# Altium PCB LM399_Reference.PcbDoc
Units mm, origin at the board's own origin, x right, y up, seen from the top; angles counter-clockwise.
Board outline 100 x 48.06 mm, 2 copper layers (Top Layer, Bottom Layer), stack 1.671 mm thick; 21 components, 8 nets, 67 pads, 1 vias.
Unrouted connection lines stored in the file: 3.
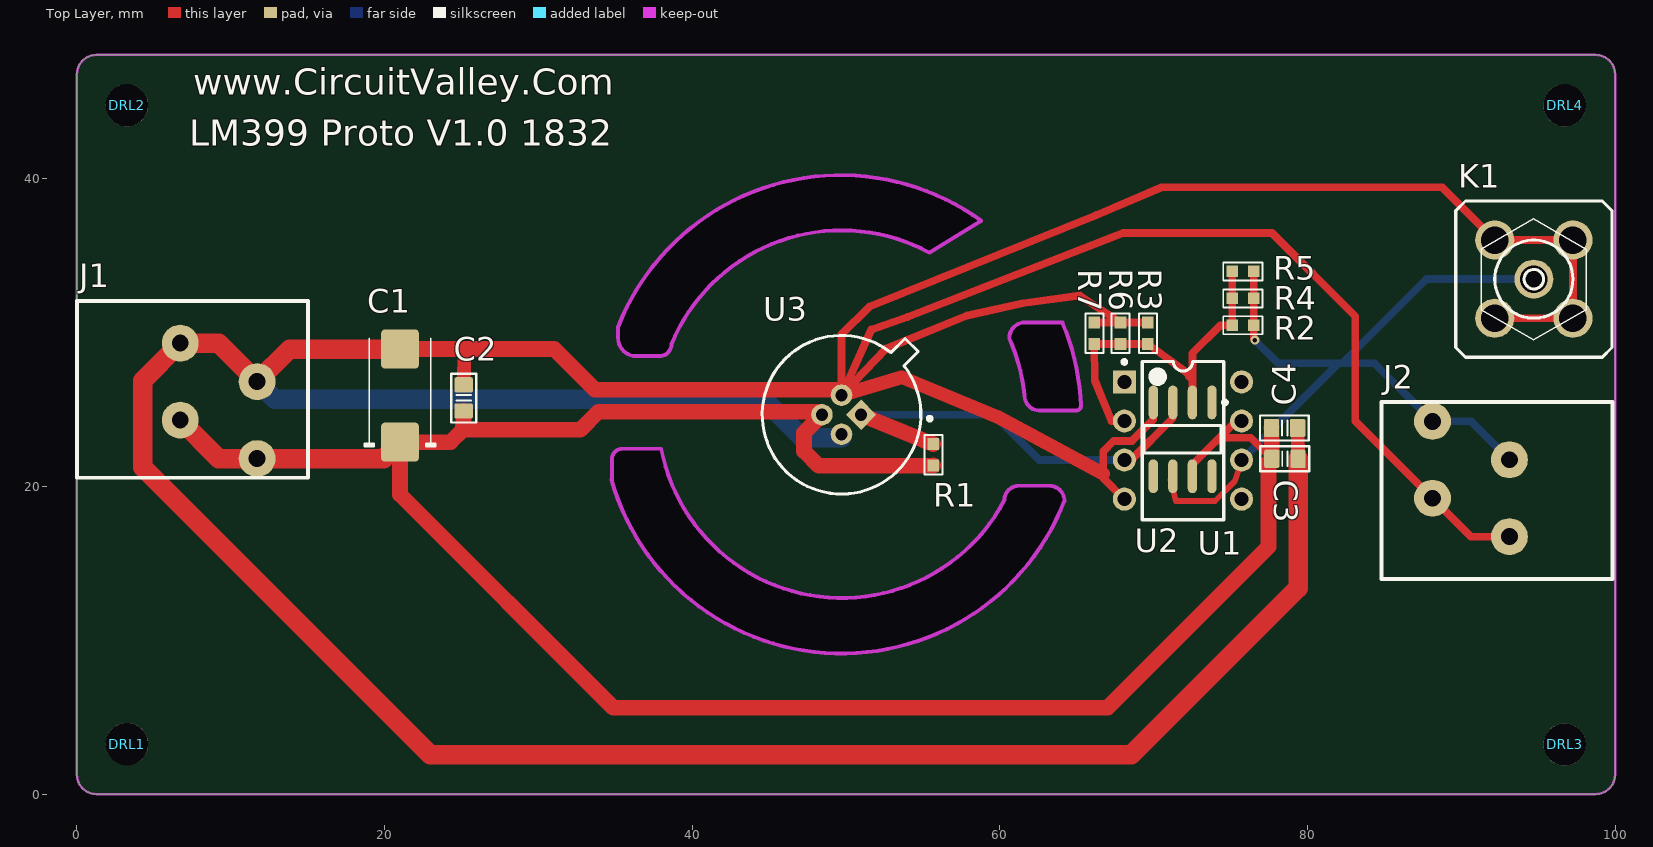
[diagram p0: Top Layer view]
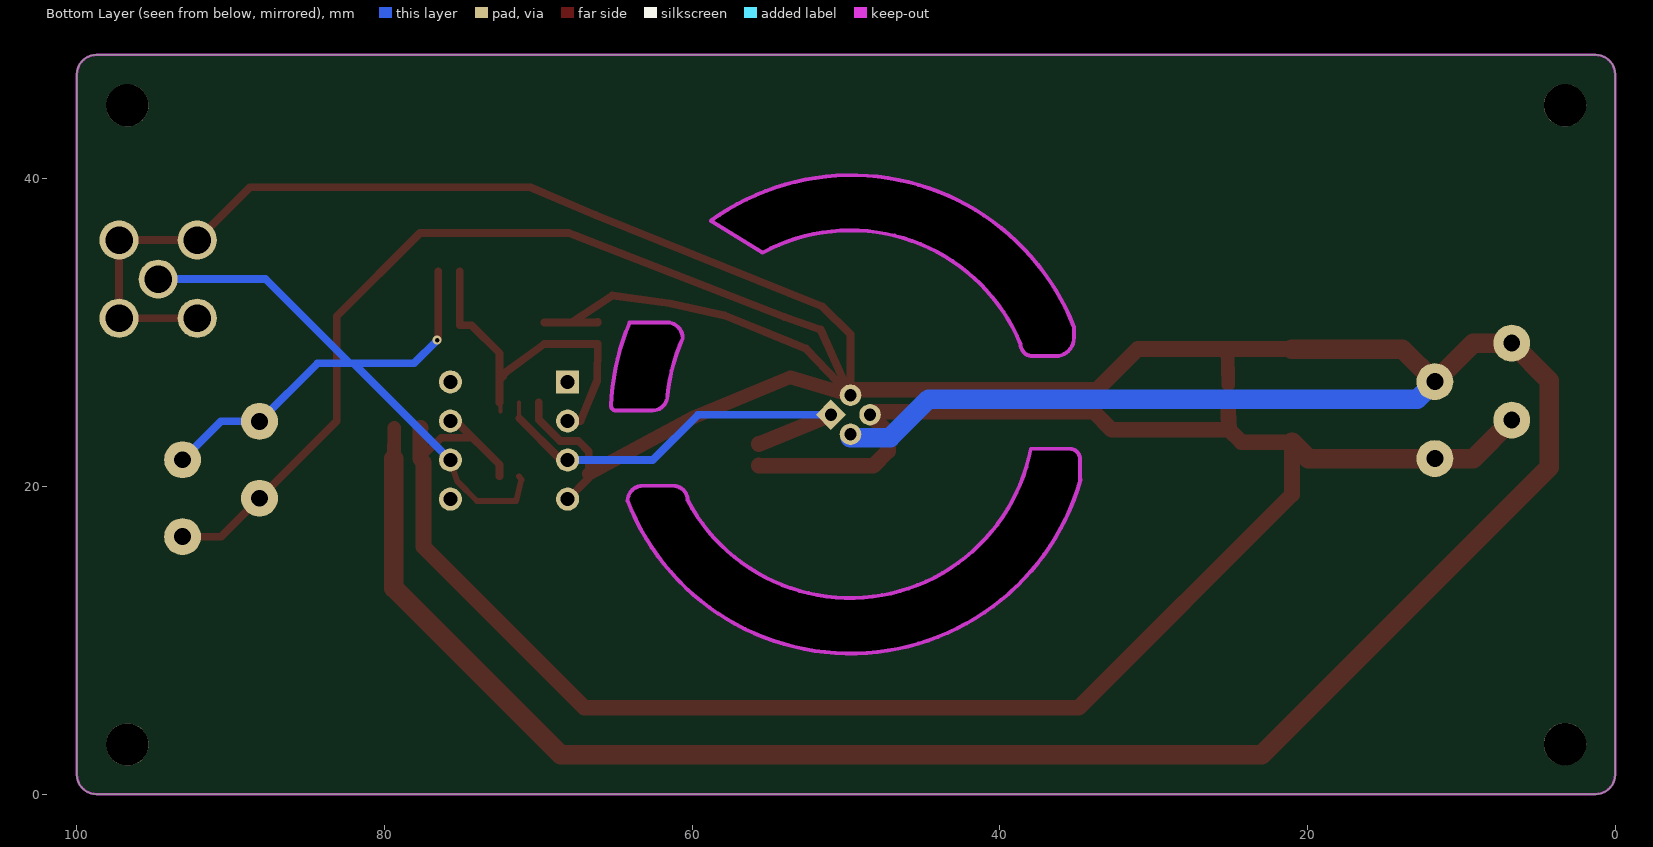
[diagram p1: Bottom Layer view, seen from below]

## Layer stack, top to bottom
Top Solder: solder mask 0.0102, Solder Resist, Dk 3.5
Top Layer: signal copper 0.0356
Dielectric 1: dielectric 1.6, FR-4, Dk 4.8
Bottom Layer: signal copper 0.0356
Bottom Solder: solder mask 0.0102, Solder Resist, Dk 3.5

## Board outline
0,1.27 0,46.787 cw(c1.27,46.787) 1.27,48.057 98.73,48.057 cw(c98.73,46.787) 100,46.787 100,1.27 cw(c98.73,1.27) 98.73,0 1.27,0 cw(c1.27,1.27)
cut-out: 64.066,30.664 64.465,29.616 64.897,28.143 65.075,27.102 65.227,25.933 65.27,25.228 65.227,25.044 64.985,24.943 62.357,24.943 61.951,25.121 61.646,25.578 61.544,26.391 61.341,27.534 61.112,28.296 60.909,28.981 60.681,29.388 60.604,29.947 60.858,30.353 61.29,30.632
cut-out: 37.983,22.454 38.303,21.184 38.608,20.371 38.862,19.71 39.294,18.898 39.675,18.263 40.183,17.501 40.792,16.764 41.707,15.824 42.901,14.91 43.942,14.249 45.11,13.665 46.457,13.208 47.549,12.979 48.616,12.802 49.886,12.751 51.41,12.852 53.162,13.233 54.407,13.665 55.55,14.249 56.794,15.062 57.887,15.926 58.801,16.916 59.588,17.932 60.298,19.103 cw(c61.286,19.103) 61.286,20.091 63.164,20.091 cw(c63.164,19.056) 64.2,19.056 63.703,17.882 63.144,16.866 62.484,15.824 61.29,14.275 60.071,13.081 58.699,11.989 57.582,11.252 56.388,10.643 55.524,10.287 54.407,9.855 53.238,9.55 51.892,9.271 50.165,9.119 48.793,9.169 47.32,9.296 46.101,9.55 44.247,10.084 42.977,10.668 41.631,11.405 40.742,12.014 39.167,13.233 37.897,14.58 37.135,15.469 36.068,17.17 35.154,19.177 34.74,20.521 34.811,21.806 34.824,22.048 35.027,22.352 35.23,22.454 35.694,22.454
cut-out: 58.791,37.271 56.744,38.532 54.635,39.446 52.629,39.954 51.029,40.183 49.682,40.234 48.26,40.183 46.761,39.98 45.441,39.675 43.84,39.116 42.469,38.481 41.173,37.744 39.954,36.855 38.862,35.916 37.567,34.468 36.855,33.528 36.144,32.41 35.636,31.445 35.178,30.354 35.178,29.669 ccw(c36.373,29.669) 36.373,28.473 37.866,28.473 ccw(c37.866,29.261) 38.654,29.261 39.116,30.201 39.446,30.861 39.98,31.699 40.64,32.487 41.326,33.223 42.088,33.934 43.078,34.646 44.247,35.331 45.39,35.865 46.457,36.22 47.676,36.5 48.793,36.627 50.063,36.678 51.257,36.576 52.476,36.373 53.467,36.068 54.661,35.56 55.42,35.199

## Design rules (kind name [scope] priority, off if disabled: settings)
Clearance [All] p1: gap=0.152
ComponentClearance [All] p1: gap=0 collisioncheckmode=3 verticalgap=0 showdistances=FALSE
PolygonConnect [All] p1: connectstyle=Relief reliefconductorwidth=0.254 reliefentries=4 polygonreliefangle="90 Angle" airgapwidth=0.254
RoutingVias [All] p1: holewidth=0.3 width=1.27 viastyle="Through Hole" minholewidth=0.3 minwidth=0.5 maxholewidth=5 maxwidth=5
SolderMaskExpansion [All] p1: expansion=0.102
Width [All] p1: maxlimit=12.7 minlimit=0.254 preferedwidth=0.254 minimp=50.000000 maximp=50.000000 favimp=50.000000
29 further rules are at their usual default settings.

## Components (designator, comment, footprint, x,y, rotation, side; value= is the part's Value field where it differs from the comment)
C1 "47uf 20V D" CAPMP7343X310N 21.006,25.908 r90 top
C2 "100n" CAPC1608N 25.146,25.756 r270 top
C3 "100n" CAPC1608N 78.537,21.793 r180 top
C4 "100n" CAPC1608N 78.511,23.8 r180 top
DRL1 "MOUNT 2.7x6.2Mask" NO_COPPER_NOMASK_2m75_6m2 3.251,3.251 r0 top
DRL2 "MOUNT 2.7x6.2Mask" NO_COPPER_NOMASK_2m75_6m2 3.251,44.78 r0 top
DRL3 "MOUNT 2.7x6.2Mask" NO_COPPER_NOMASK_2m75_6m2 96.723,3.226 r0 top
DRL4 "MOUNT 2.7x6.2Mask" NO_COPPER_NOMASK_2m75_6m2 96.723,44.78 r0 top
J1 "804-102" 804-102 7.518,26.314 r270 top
J2 "804-102" 804-102 92.329,19.736 r90 top
K1 "SMA-V" SMA-V 94.717,33.477 r180 top
R1 "7K5" 0603R-GENERIC 55.677,21.361 r90 top
R2 "9K" 0603R-TBD 75.108,30.48 r0 top
R3 "20K" 0603R-GENERIC 69.621,30.658 r270 top
R4 "9K" 0603R-TBD 75.108,32.233 r0 top
R5 "9K" 0603R-TBD 75.108,33.985 r0 top
R6 "20K" 0603R-GENERIC 67.843,30.658 r270 top
R7 "20K" 0603R-GENERIC 66.142,30.658 r270 top
U1 "LT1001CS8" S8_N 71.882,23.063 r270 top
U2 "LT1001ACN8" N8 71.907,22.987 r0 top
U3 "LM399" TO-46 49.708,24.663 r180 top

## Footprints (in the part's own frame and the unit in brackets; to place one, negate y for a bottom-side part, rotate by r counter-clockwise, add the part's x,y. Pads: shape width x height; smd on the part's side, far side on the other; paste and mask are expansions set on the pad)
0603R-GENERIC [mil] "RESISTOR 0603"
  rect 30x30 smd: 1(0,0) 2(55,0)
  silkscreen extent -23,-23 78,23, body extent -4,-15 59,15, height 19
0603R-TBD [mil] "RESISTOR 0603 VALUE TO BE DETERMINED"
  rect 30x30 smd: 1(0,0) 2(55,0)
  silkscreen extent -23,-23 78,23, body extent -4,-15 59,15, height 20
804-102 [mm] "Wago"
  round 2.4 hole 1.1: 1(-3,-0.8) 1(-0.5,4.2) 2(2,-0.8) 2(4.5,4.2)
  silkscreen extent -5.75,-7.5 5.75,7.52, body extent -5.69,-7.51 5.81,7.49, height 14.41
CAPC1608N [mm] "Chip Capacitor, Body 1.6x0.8mm, 0603, IPC Medium Density"
  round 0.254 on Mech14: 0(0,0)
  rrect25% 1x1.2 smd: 1(-0.85,0) 2(0.85,0)
  Top Layer pour cut-out: -0.4,0.6 0.4,0.6 0.4,-0.6 -0.4,-0.6
  silkscreen extent -1.57,-0.81 1.6,0.81, body extent -0.85,-0.45 0.85,0.45, height 0.89
CAPMP7343X310N [mm] "Molded body capacitor, Body 7.3x4.3mm, 2917, IPC Nominal settings"
  round 1 on Mech14: 0(0,0)
  rrect20% 2.55x2.45 smd: 1(-3.025,0) 2(3.025,0)
  silkscreen extent -3.3,-2.3 3.7,2.3, body extent -3.8,-1.97 3.8,1.98, height 3.1
N8 [mm] "DIP, 8-Leads, Row Spacing 7.62mm, Pitch 2.54mm, Body 9.78x6.48mm"
  rect 1.5x1.5 hole 0.9: 1(-3.81,3.81)
  round 1.5 hole 0.9: 2(-3.81,1.27) 3(-3.81,-1.27) 4(-3.81,-3.81) 5(3.81,-3.81) 6(3.81,-1.27) 7(3.81,1.27) 8(3.81,3.81)
  silkscreen extent -3.93,-5.15 2.65,5.23, body extent -3.6,-5.15 3.6,5.15, height 4.45
NO_COPPER_NOMASK_2m75_6m2 [mm]
  round 6.3 on Keep-Out: 0(0,0)
  round 2.75 hole 2.75 unplated mask+1.75: D2m7(0,0)
S8_N [mm] "SOIC, 8-Leads, Body 4.9x3.9mm, Pitch 1.27mm, IPC Medium Density"
  oval 2.2x0.6 smd: 1(-2.4,1.905) 2(-2.4,0.635) 3(-2.4,-0.635) 4(-2.4,-1.905) 5(2.4,-1.905) 6(2.4,-0.635) 7(2.4,0.635) 8(2.4,1.905)
  silkscreen extent -2.52,-2.5 0.9,2.88, body extent -2,-2.5 2,2.5, height 1.76
SMA-V [mil]
  round 100 hole 70: 1(0,0) 2(100,-100) 3(100,100) 4(-100,100) 5(-100,-100)
  silkscreen extent -200,-200 200,200, body extent -138,-136 137,140, height 386
TO-46 [mm] "LM399"
  rect 1.4x1.4 hole 0.8 rot 45: 1(-1.27,0)
  round 1.4 hole 0.8: 2(0,-1.27) 3(1.27,0) 4(0,1.27)
  silkscreen extent -5.86,-5.16 5.16,5.16, body extent -5.33,-5.33 5.33,5.59, height 8.94

## Part data
C1: library part CAPT_330u_2917_6V3, "Capacitor SMD Tant 330uF 20% 6V3 2917"
C2 C3 C4: library part CAPC_10p_0603_NP0_1%_50V, "Capacitor SMD Cer 10pF 5% 50V NP0 0603"
DRL1 DRL2 DRL3 DRL4: library part DRILL_2.7x6.2Mask_NOCOPPER
K1: "SMA THREADED RF CONNECTOR VERTICAL"
R1: library part 0603R-7K5, "GENERIC RESISTOR 0603"
R2 R4 R5: library part 0603R-TBD, "RESISTOR 0603 VALUE TO BE DETERMINED"
R3 R6 R7: library part 0603R-20K, "GENERIC RESISTOR 0603"
U1 U2: "General Purpose, High Precision Op Amp"

## Via types
v1: diameter 0.6, hole 0.3, Top Layer to Bottom Layer, tented both sides, 1 vias

## Nets (pads, with @x,y where several pads share a name; then routed paths per layer and width w, separated by ;. In a path a pad name is that pad's centre, name@x,y a point inside that pad or via, vN(x,y) a via of type N, cw(c..) or ccw(c..) an arc to the next point about the centre after c; other vN are vias at no path point)
GND: C1.2 C2.1 C3.1 C4.1 J1.1 J2.1 K1.2 K1.3 K1.4 K1.5 R3.1 R6.1 R7.1 U1.4 U2.4 U3.2 U3.4 | length 371.5
  Top Layer w0.508: U3.2@49.96,26.49 51.638,30.201 54.008,31.016 67.564,36.296 68.021,36.474 77.699,36.474 83.109,31.064 83.109,24.256 88.129,19.236 90.629,16.736 J2.1@93.129,16.736 ; R7.1 66.904,30.658 ; R7.1@66.145,30.707 66.904,30.658 ; U2.4 66.726,20.549 66.726,20.828 66.726,22.276 67.412,22.962 68.588,22.962 69.977,24.351 U1.4 ; R3.1 R6.1 ; K1.3 K1.4 K1.5 K1.2 88.748,39.446 70.536,39.446 66.294,37.643 51.541,31.694 49.708,29.896 U3.2 49.834,26.066 52.602,28.96 53.628,29.379 57.887,31.115 61.492,31.909 61.982,31.975 65.202,32.41 R6.1 ; 66.904,30.658 R6.1
  Top Layer w0.889: C2.1 25.197,28.933 ; U3.2 53.619,27.102 59.817,24.536 66.726,20.828 ; C4.1 C3.1
  Top Layer w1.016: C1.2 25.197,28.933 31.036,28.933 33.68,26.289 49.352,26.289 U3.2
  Top Layer w1.27: C1.2 13.837,28.933 11.718,26.814 9.218,29.314 6.718,29.314 4.267,26.863 4.267,21.26 22.962,2.565 68.555,2.565 79.387,13.398 C3.1
  Bottom Layer w1.27: J1.1@11.718,26.814 12.853,25.679 44.628,25.679 47.131,23.176 49.708,23.176 U3.4
NetC1_1: C1.1 C2.2 C3.2 C4.2 J1.2 R1.1 U1.7 U2.7 U3.3 | length 143.9
  Top Layer w0.508: U1.7 72.517,21.412 75.362,24.257 U2.7 ; 74.27,23.165 76.315,23.165 C3.2
  Top Layer w1.016: C2.2 25.103,23.693 ; R1.1 53.569,21.336 48.235,21.336 47.269,22.301 47.269,23.495 U3.3 48.235,24.867 33.909,24.867 32.735,23.693 25.103,23.693 ; C4.2 77.687,23.774 C3.2 77.47,21.576 77.47,16.078 67.005,5.613 34.874,5.613 21.006,19.482 C1.1 24.294,22.883 25.103,23.693
  Top Layer w1.27: J1.2@6.718,24.314 9.218,21.814 11.718,21.814 19.937,21.814 C1.1
NetJ2_2: J2.2 K1.1 R2.2 R4.2 R5.2 U1.6 U2.6 | length 55.4
  Top Layer w0.381: U1.6 71.106,20.434 71.433,19.05 73.99,19.05 75.273,20.333 U2.6
  Top Layer w0.508: R5.2 R4.2 R2.2 76.505,29.591 v1(76.581,29.515)
  Bottom Layer w0.508: U2.6 82.017,28.016 ; v1(76.581,29.515) 78.08,28.016 82.017,28.016 ; J2.2@93.129,21.736 90.629,24.236 88.129,24.236 84.349,28.016 82.271,28.016 ; K1.1 87.732,33.477 82.271,28.016 ; 82.017,28.016 82.271,28.016
NetR1_2: R1.2 U1.3 U2.3 U3.1 | length 28.7
  Top Layer w0.254: U1.3@71.247,24.435 U1.3
  Top Layer w0.508: U2.3 68.529,21.717 U1.3@71.247,24.435
  Top Layer w1.016: U3.1 R1.2
  Bottom Layer w0.508: U3.1 59.614,24.663 62.56,21.717 U2.3
NetR2_1: R2.1 R3.2 R4.1 R5.1 R6.2 R7.2 U1.2 U2.2 | length 25.1
  Top Layer w0.254: 72.161,27.127 72.466,26.822 U1.2@72.466,24.867
  Top Layer w0.508: U2.2 67.259,24.257 66.167,26.899 R7.2 R6.2 R3.2 72.161,27.381 ; U1.2 72.517,28.651 74.346,30.48 R2.1 R4.1 R5.1
NetU1_1: U1.1 U2.1
NetU1_5: U1.5 U2.5
NetU1_8: U1.8 U2.8
pads on no net: C1.0 C2.0 C3.0 C4.0 DRL1.0 DRL1.D2m7 DRL2.0 DRL2.D2m7 DRL3.0 DRL3.D2m7 DRL4.0 DRL4.D2m7

## Keep-outs
Keep-Out Layer:
  lines w0.152: 0,1.27 ccw(c1.27,1.27) 1.27,0 3.658,0 98.73,0 ccw(c98.73,1.27) 100,1.27 100,46.787 ccw(c98.73,46.787) 98.73,48.057 1.27,48.057 ccw(c1.27,46.787) 0,46.787 0,1.27
  lines w0.254: 34.751,20.441 ccw(c49.708,24.689) 64.2,19.056 ccw(c63.211,19.056) 63.211,20.045 62.26,20.045 61.24,20.045 ccw(c61.24,19.103) 60.298,19.103 cw(c49.733,24.714) 37.988,22.444 ; 34.786,20.371 34.786,21.781 cw(c35.458,21.781) 35.458,22.454 37.983,22.454 ; 35.178,29.669 ccw(c36.373,29.669) 36.373,28.473 37.866,28.473 ccw(c37.866,29.261) 38.654,29.261 cw(c49.708,24.689) 55.42,35.199 58.791,37.271 ccw(c49.657,24.689) 35.178,30.354 35.178,29.669 ; 60.611,29.636 cw(c61.639,29.636) 61.639,30.664 64.066,30.664 cw(c49.733,24.638) 65.27,25.228 cw(c64.985,25.228) 64.985,24.943 62.573,24.943 cw(c62.573,25.905) 61.611,25.905 ccw(c49.708,24.714) 60.611,29.636

## Silkscreen, mask and mechanical layers (free items; w line width, h text height)
Top Overlay:
  text "www.CircuitValley.Com" at 7.569,45.466 h1.7
  text "LM399 Proto V1.0 1832" at 7.315,42.164 h1.7